# Altium PCB PCB2.PcbDoc
Units mm, origin at the board's own origin, x right, y up, seen from the top; angles counter-clockwise.
Board outline 64.77 x 54.74 mm, 2 copper layers (Top Layer, Bottom Layer); 36 components, 10 nets, 61 pads, 0 vias.
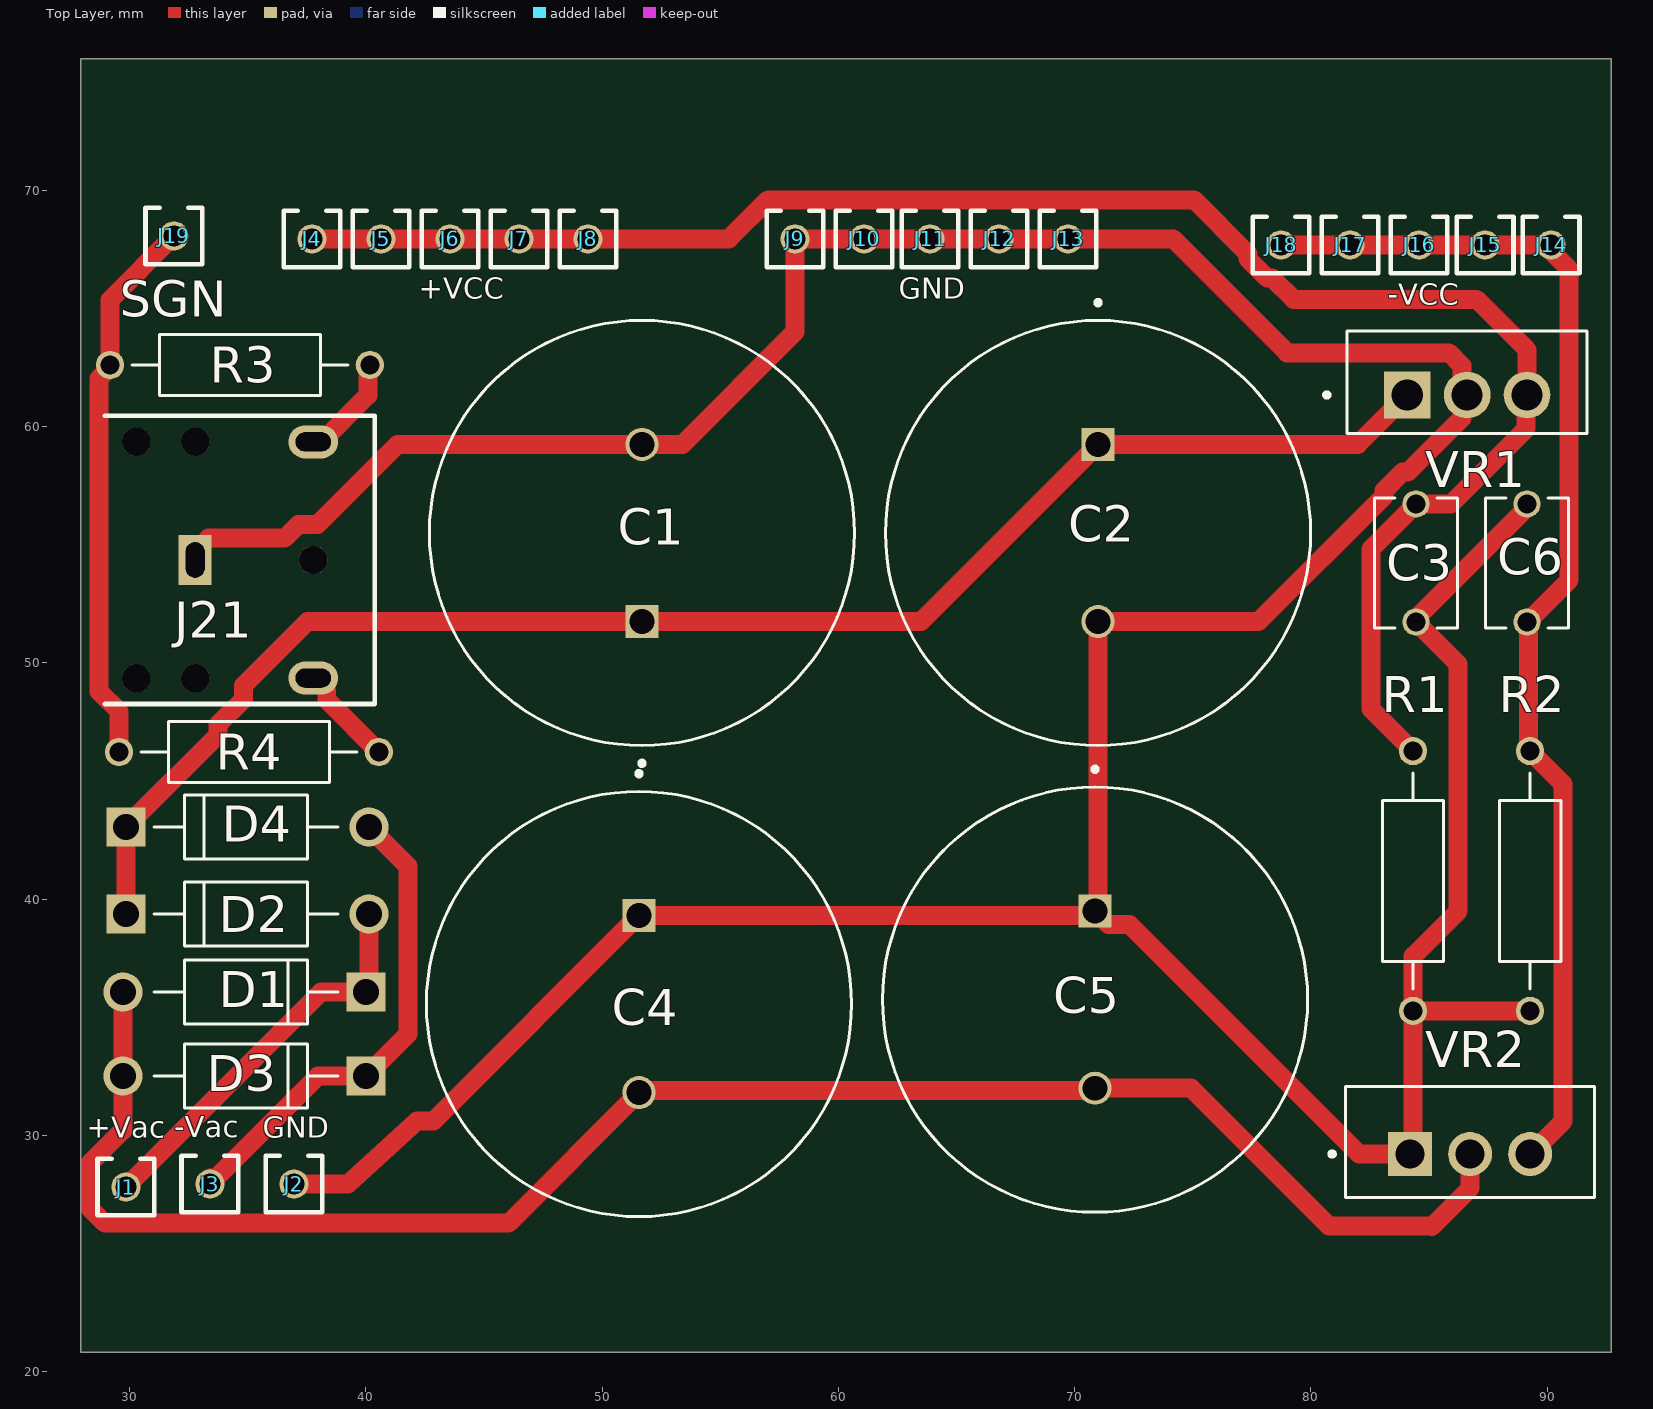
[diagram p0: Top Layer view]
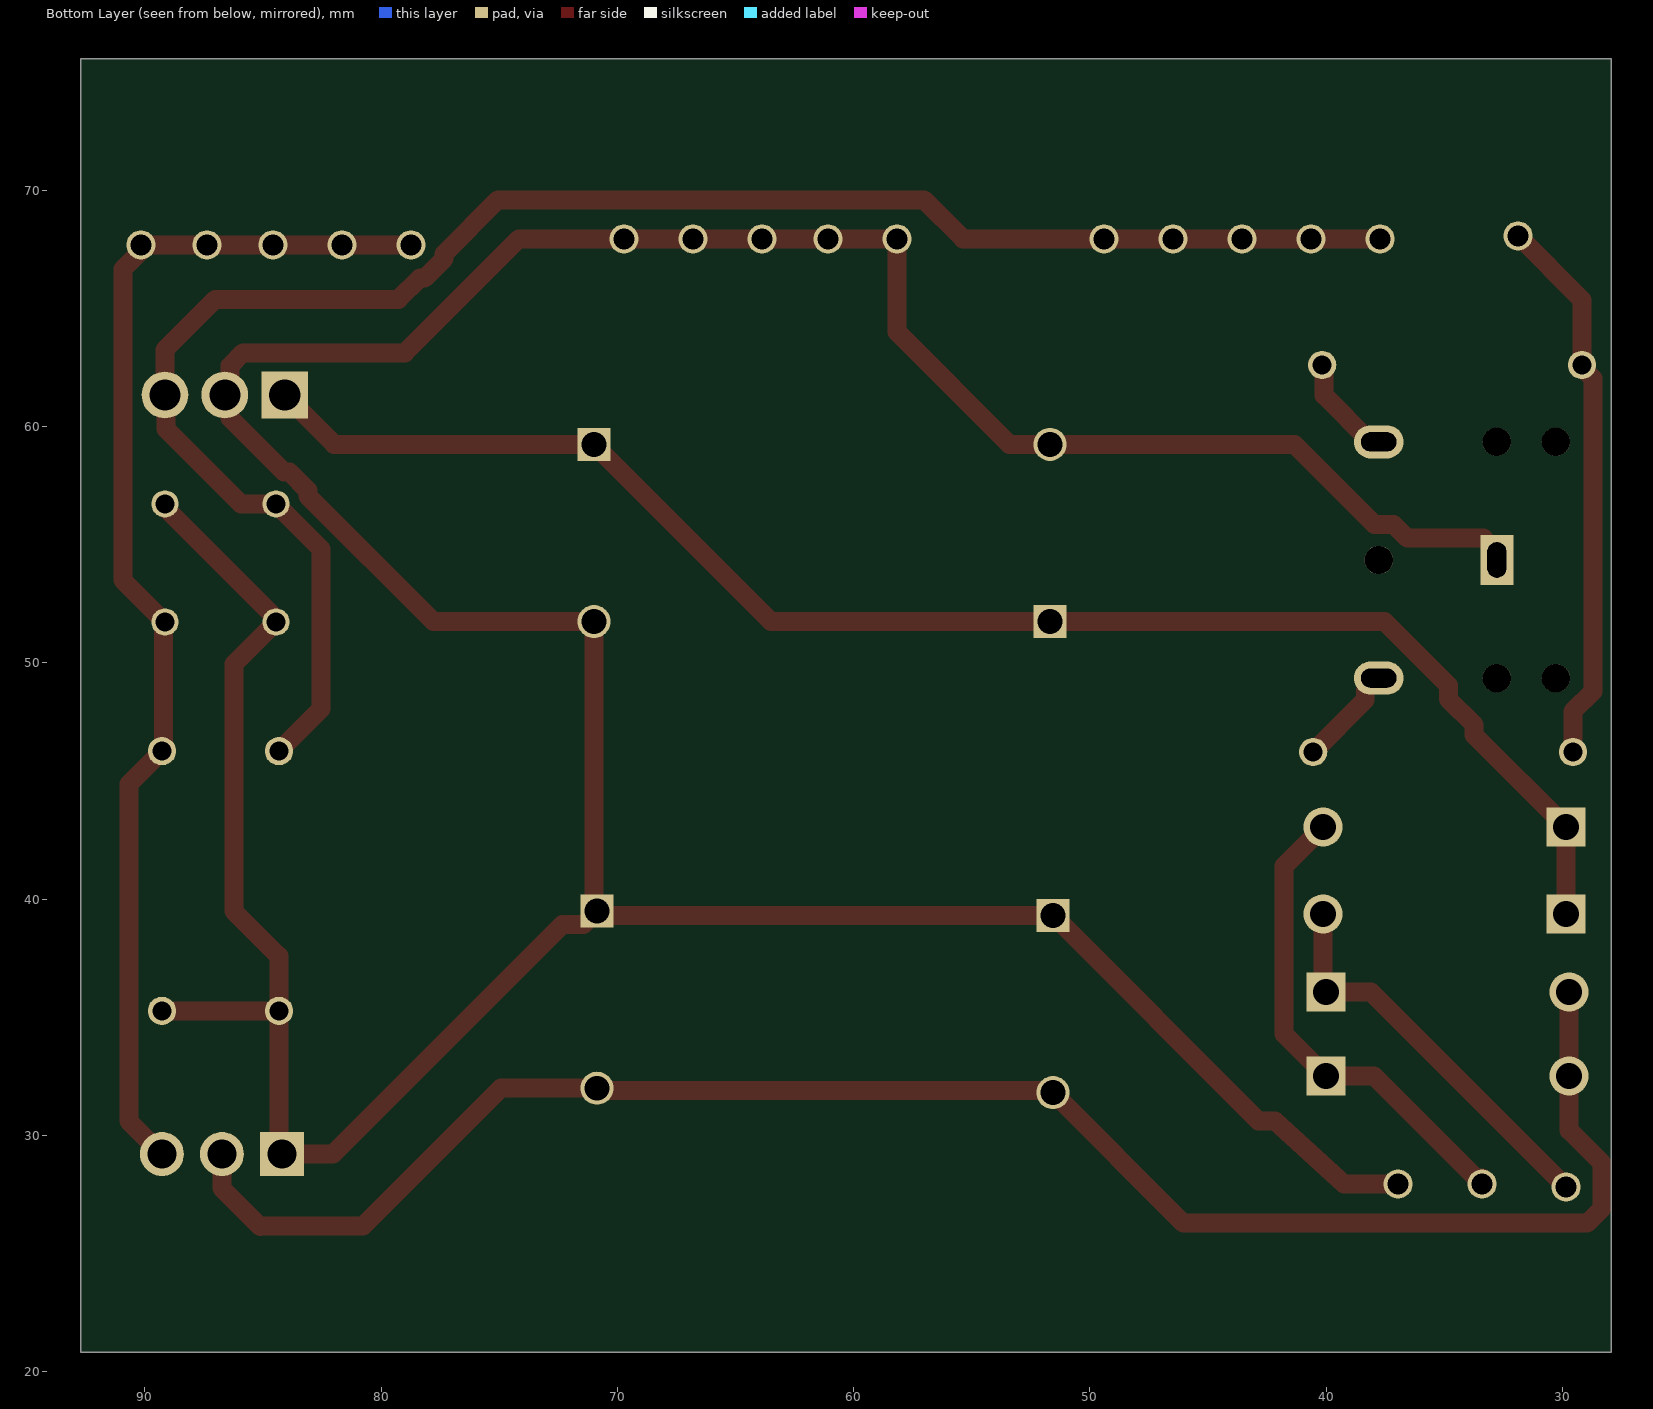
[diagram p1: Bottom Layer view, seen from below]
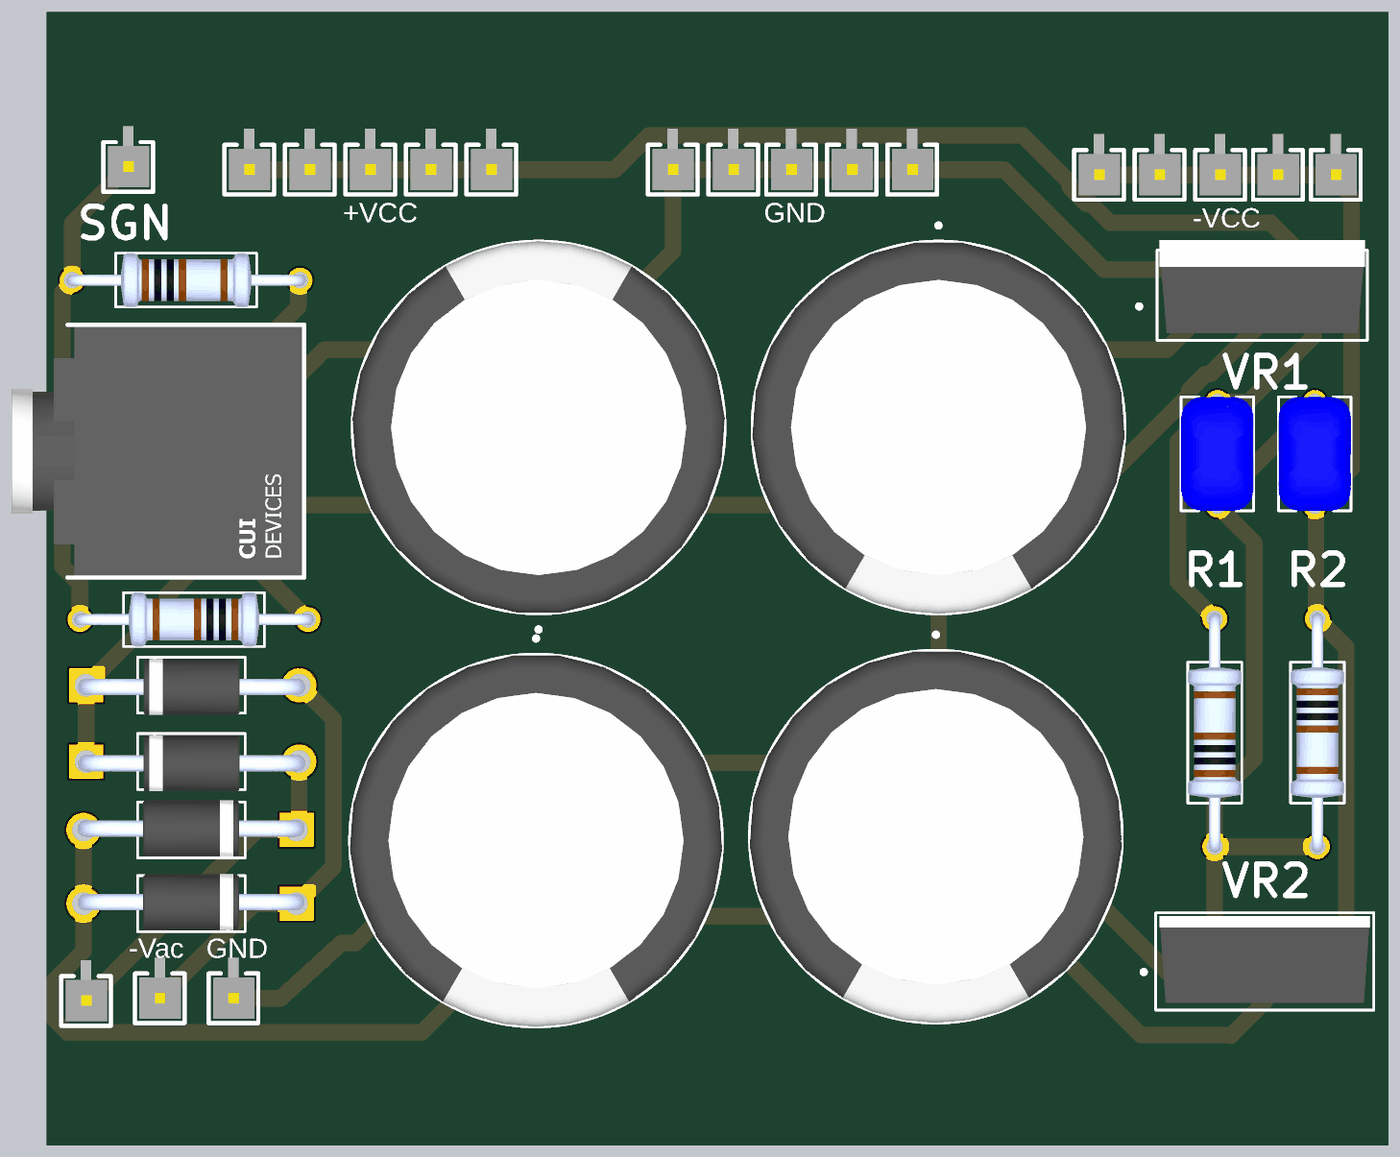
[diagram p2: 3D render of the assembled board from above, using the file's embedded part models]

## Layer stack, top to bottom
Top Solder: solder mask 0.0102, Solder Resist, Dk 3.5
Top Layer: signal copper 0.0356
Dielectric 1: dielectric 0.32, FR-4, Dk 4.8
Bottom Layer: signal copper 0.0356
Bottom Solder: solder mask 0.0102, Solder Resist, Dk 3.5

## Board outline
27.94,20.828 92.71,20.828 92.71,75.565 27.94,75.565

## Design rules (kind name [scope] priority, off if disabled: settings)
Clearance [All] p1: gap=0.381 ignorepadtopadclearanceinfootprint=FALSE except(0.508: Arc-Hole Track-Hole SMDPad-Hole THPad-Hole Via-Hole Fill-Hole Poly-Hole Region-Hole Text-Hole)
ComponentClearance [All] p1: gap=0.381 collisioncheckmode=3 verticalgap=0.381 showdistances=FALSE
PolygonConnect [All] p1: connectstyle=Relief reliefconductorwidth=0.254 reliefentries=4 polygonreliefangle="90 Angle" airgapwidth=0.254
RoutingVias [All] p1: holewidth=0.711 width=1.27 viastyle="Through Hole" minholewidth=0.711 minwidth=1.27 maxholewidth=0.711 maxwidth=1.27
SolderMaskExpansion [All] p1: expansion=0.102 istentingtop=FALSE
Width [All] p1: maxlimit=1.016 minlimit=0.254 preferedwidth=0.508
29 further rules are at their usual default settings.

## Components (designator, comment, footprint, x,y, rotation, side; value= is the part's Value field where it differs from the comment)
C1 "1000uF" CAPPRD750W80D1800H2500 51.689,55.499 r90 top
C2 "10uF" CAPPRD750W80D1800H2500 70.993,55.499 r270 top
C3 "0.1uF" CAPRB500W50L550T350H600 84.455,54.229 r90 top
C4 "1000uF" CAPPRD750W80D1800H2500 51.562,35.56 r270 top
C5 "10uF" CAPPRD750W80D1800H2500 70.866,35.747 r270 top
C6 "0.1uF" CAPRB500W50L550T350H600 89.154,54.229 r90 top
D1 "1N4007" DIOAD1060W80L520D270 34.925,36.068 r180 top
D2 "1N4007" DIOAD1060W80L520D270 34.925,39.37 r0 top
D3 "1N4007" DIOAD1060W80L520D270 34.925,32.512 r180 top
D4 "1N4007" DIOAD1060W80L520D270 34.925,43.053 r0 top
J1 "+Vac" SAMTEC_MTMM-101-XX-X-S-XXX 29.845,27.813 r0 top
J2 "GND" SAMTEC_MTMM-101-XX-X-S-XXX 36.957,27.94 r0 top
J3 "-Vac" SAMTEC_MTMM-101-XX-X-S-XXX 33.401,27.94 r0 top
J4 "+VCC" SAMTEC_MTMM-101-XX-X-S-XXX 37.719,67.945 r0 top
J5 "+VCC" SAMTEC_MTMM-101-XX-X-S-XXX 40.64,67.945 r0 top
J6 "+VCC" SAMTEC_MTMM-101-XX-X-S-XXX 43.561,67.945 r0 top
J7 "+VCC" SAMTEC_MTMM-101-XX-X-S-XXX 46.482,67.945 r0 top
J8 "+VCC" SAMTEC_MTMM-101-XX-X-S-XXX 49.403,67.945 r0 top
J9 "GND" SAMTEC_MTMM-101-XX-X-S-XXX 58.166,67.945 r0 top
J10 "GND" SAMTEC_MTMM-101-XX-X-S-XXX 61.087,67.945 r0 top
J11 "GND" SAMTEC_MTMM-101-XX-X-S-XXX 63.881,67.945 r0 top
J12 "GND" SAMTEC_MTMM-101-XX-X-S-XXX 66.802,67.945 r0 top
J13 "GND" SAMTEC_MTMM-101-XX-X-S-XXX 69.723,67.945 r0 top
J14 "-VCC" SAMTEC_MTMM-101-XX-X-S-XXX 90.17,67.691 r0 top
J15 "-VCC" SAMTEC_MTMM-101-XX-X-S-XXX 87.376,67.691 r0 top
J16 "-VCC" SAMTEC_MTMM-101-XX-X-S-XXX 84.582,67.691 r0 top
J17 "-VCC" SAMTEC_MTMM-101-XX-X-S-XXX 81.661,67.691 r0 top
J18 "-VCC" SAMTEC_MTMM-101-XX-X-S-XXX 78.74,67.691 r0 top
J19 "SGN" SAMTEC_MTMM-101-XX-X-S-XXX 31.877,68.072 r0 top
J21 "SJ1-3523N" CUI_Devices_0_MFG 33.274,54.356 r0 top
R1 "100" RESAD1100W55L680D260 84.328,40.767 r90 top
R2 "100" RESAD1100W55L680D260 89.281,40.767 r270 top
R3 "MFR-25FBF52-1K" RESAD1100W55L680D260 34.671,62.611 r0 top
R4 "MFR-25FBF52-1K" RESAD1100W55L680D260 35.052,46.228 r180 top
VR1 "LM7812CT" TO253P1057X470X2040-3 86.619,61.881 r0 top
VR2 "LM7912CT/NOPB" TO254P1054X470X1955-3 86.741,29.21 r0 top

## Footprints (in the part's own frame and the unit in brackets; to place one, negate y for a bottom-side part, rotate by r counter-clockwise, add the part's x,y. Pads: shape width x height; smd on the part's side, far side on the other; paste and mask are expansions set on the pad)
CAPPRD750W80D1800H2500 [mm]
  round 1.4 hole 1.05: N(3.75,0)
  rect 1.4x1.4 hole 1.05: P(-3.75,0)
  silkscreen extent -9.85,-9 9,9, body extent -9,-9 9,9, height 25
CAPRB500W50L550T350H600 [mm]
  round 1.15 hole 0.8: 1(-2.5,0) 2(2.5,0)
  silkscreen extent -2.75,-1.75 2.75,1.75, body extent -2.75,-1.75 2.75,1.75, height 6.81
CUI_Devices_0_MFG [mm]
  rect 1.4x2.1 hole 1.5 slot 0.8 at 0 deg paste-1000 mask+0: 1(-0.5,0)
  rrect100% 2.1x1.4 hole 0.8 slot 1.5 at 0 deg paste-1000 mask+0: 2(4.5,-5) 3(4.5,5)
  round 1.2 hole 1.2 unplated paste-1000 mask+0: ""(-3,-5) ""(-3,5) ""(-0.5,-5) ""(-0.5,5) ""(4.5,0)
  silkscreen extent -4.33,-6.1 7.1,6.1, body extent -7.2,-6.2 7.2,6.2, height 0.25
DIOAD1060W80L520D270 [mm]
  round 1.65 hole 1.1: A(5.207,0)
  rect 1.65x1.65 hole 1.1: C(-5.08,0)
  silkscreen extent -3.9,-1.35 3.9,1.35, body extent -5.46,-1.42 5.49,1.27, height 3.96
RESAD1100W55L680D260 [mm]
  round 1.2 hole 0.8: 1(-5.5,0) 2(5.5,0)
  silkscreen extent -4.58,-1.3 4.58,1.3, body extent -5.77,-1.3 5.77,1.3, height 2.6
SAMTEC_MTMM-101-XX-X-S-XXX [mm]
  round 1.24 hole 0.89: 01(0,0)
  silkscreen extent -1.2,-1.2 1.2,1.2, body extent -0.98,-0.98 1.02,1.02, height 7.23
TO253P1057X470X2040-3 [mm]
  rect 1.98x1.98 / inner round 1.98 / far side rect 1.98x1.98 hole 1.32: 1(-2.535,-0.54)
  round 1.98 hole 1.32: 2(0,-0.54) 3(2.535,-0.54)
  silkscreen extent -6.04,-2.17 5.08,2.17, body extent -5,-1.84 5,2.66, height 18.95
TO254P1054X470X1955-3 [mm]
  rect 1.86x1.86 / inner round 1.86 / far side rect 1.86x1.86 hole 1.24: 1(-2.54,0)
  round 1.86 hole 1.24: 2(0,0) 3(2.54,0)
  silkscreen extent -5.94,-1.84 5.27,2.86, body extent -5.08,-1.49 5.08,2.71, height 22.86

## Part data
C1 C2 C4 C5: library part EEUEE2V820S, "CAP ALUM 82UF 20% 350V RADIAL", Package="RADIAL-2 Panasonic", Availability="In Stock", Check_prices=https://www.snapeda.com/parts/EEU-EE2V820S/Panasonic+Electronic+Components/view-part/?ref=eda, MF="Panasonic Electronic", MP=EEU-EE2V820S, Price=None, Purchase-URL=https://pricing.snapeda.com/search/part/EEU-EE2V820S/?ref=eda, SnapEDA_Link=https://www.snapeda.com/parts/EEU-EE2V820S/Panasonic+Electronic+Components/view-part/?ref=snap
C3 C6: library part FG26X7R2E104KNT06, "0.1ÂµF Â±10% 250V Ceramic Capacitor X7R Radial", Package="Radial TDK", Availability="In Stock", Check_prices=https://www.snapeda.com/parts/FG26X7R2E104KNT06/TDK/view-part/?ref=eda, MF=TDK, MP=FG26X7R2E104KNT06, Price=None, Purchase-URL=https://pricing.snapeda.com/search/part/FG26X7R2E104KNT06/?ref=eda, SnapEDA_Link=https://www.snapeda.com/parts/FG26X7R2E104KNT06/TDK/view-part/?ref=snap
D1 D2 D3 D4: "Diode Switching 1KV 1A 2-Pin DO-41", Package=None, Availability=Unavailable, MP=1N4007, Price=None
J1 J2 J3 J4 J5 J6 J7 J8 J9 J10 J11 J12 J13 J14 J15 J16 J17 J18 J19: library part MTMM-101-XX-X-S-XXX, "Connector Header position", Package=None, Availability=Unavailable, MP=MTMM-101-XX-X-S-XXX, Price=None
R1 R2: library part MFR-25FBF52-1K, "1.78 kOhms Â±1% 0.25W, 1/4W Through Hole Resistor Axial - Metal Film", Package="Axial Yageo", Availability="In Stock", Check_prices=https://www.snapeda.com/parts/MFR-25FBF52-1K/Yageo/view-part/?ref=eda, MF=Yageo, MP=MFR-25FBF52-1K, Price=None, Purchase-URL=https://pricing.snapeda.com/search/part/MFR-25FBF52-1K/?ref=eda, SnapEDA_Link=https://www.snapeda.com/parts/MFR-25FBF52-1K/Yageo/view-part/?ref=snap
R3 R4: "1.78 kOhms Â±1% 0.25W, 1/4W Through Hole Resistor Axial - Metal Film", Package="Axial Yageo", Availability="In Stock", Check_prices=https://www.snapeda.com/parts/MFR-25FBF52-1K/Yageo/view-part/?ref=eda, MF=Yageo, MP=MFR-25FBF52-1K, Price=None, Purchase-URL=https://pricing.snapeda.com/search/part/MFR-25FBF52-1K/?ref=eda, SnapEDA_Link=https://www.snapeda.com/parts/MFR-25FBF52-1K/Yageo/view-part/?ref=snap
VR1: "Linear Voltage Regulator IC Positive Fixed 1 Output  1A TO-220-3", Package=TO-220, Availability=Unavailable, Check_prices=https://www.snapeda.com/parts/LM7812CT/Onsemi/view-part/?ref=eda, MF="ON Semiconductor", MP=LM7812CT, Price=None, SnapEDA_Link=https://www.snapeda.com/parts/LM7812CT/Onsemi/view-part/?ref=snap
VR2: "1.5-A, negative linear voltage regulator", Package="TO-220-3 Texas Instruments", Availability="In Stock", Check_prices=https://www.snapeda.com/parts/LM7912CT/NOPB/Texas+Instruments/view-part/?ref=eda, MF="Texas Instruments", MP=LM7912CT/NOPB, Price=None, Purchase-URL=https://pricing.snapeda.com/search/part/LM7912CT/NOPB/?ref=eda, SnapEDA_Link=https://www.snapeda.com/parts/LM7912CT/NOPB/Texas+Instruments/view-part/?ref=snap

## Nets (pads, with @x,y where several pads share a name; then routed paths per layer and width w, separated by ;. In a path a pad name is that pad's centre, name@x,y a point inside that pad or via, vN(x,y) a via of type N, cw(c..) or ccw(c..) an arc to the next point about the centre after c; other vN are vias at no path point)
GND: C1.N C2.N C3.1 C4.P C5.P C6.2 J2.01 J9.01 J10.01 J11.01 J12.01 J13.01 J21.1 R1.1 R2.2 VR1.2 VR2.1 | length 190
  Top Layer w0.8: J21.1 32.774,54.706 33.347,55.279 36.564,55.279 37.149,55.864 37.957,55.864 41.342,59.249 C1.N 53.407,59.249 58.166,64.008 J9.01 J10.01 J11.01 J12.01 J13.01 74.168,67.945 78.994,63.119 85.852,63.119 86.393,62.578 86.393,61.567 VR1.2 86.393,61.115 86.393,60.358 84.12,58.085 83.893,58.085 83.099,57.291 83.099,57.064 77.784,51.749 C2.N 70.993,39.624 C5.P ; J2.01 39.243,27.94 42.164,30.607 42.859,30.607 C4.P 70.679,39.31 C5.P ; C6.2 89.154,56.578 84.455,51.88 C3.1 86.233,49.951 86.233,39.497 84.328,37.592 R1.1 ; R2.2 R1.1 ; C5.P 71.439,38.924 72.328,38.924 82.042,29.21 VR2.1 84.328,29.337 R1.1
NetC1_P: C1.P C2.P D2.C D4.C VR1.1 | length 66.3
  Top Layer w0.8: D2.C@29.972,39.497 D2.C D4.C 33.733,46.941 33.733,47.374 34.827,48.468 34.827,49.051 37.525,51.749 C1.P 63.493,51.749 C2.P 81.992,59.249 VR1.1
NetC3_2: C3.2 J4.01 J5.01 J6.01 J7.01 J8.01 R1.2 VR1.3 | length 76.2
  Top Layer w0.8: J4.01 J5.01 J6.01 J7.01 J8.01 55.372,67.945 57.023,69.596 75.057,69.596 77.339,67.314 77.339,67.111 78.16,66.29 78.363,66.29 79.268,65.385 87.015,65.385 89.154,63.246 VR1.3 89.104,61.291 89.104,59.894 85.939,56.729 C3.2 82.55,54.824 82.55,48.045 R1.2
NetC4_N: C4.N C5.N D1.A D3.A VR2.2 | length 75.3
  Top Layer w0.8: D1.A D3.A 29.718,30.213 28.321,28.816 28.321,26.924 28.956,26.289 46.041,26.289 51.655,31.903 70.773,31.903 C5.N 74.937,31.997 80.772,26.162 85.09,26.162 85.112,26.14 86.741,27.769 VR2.2
NetC6_1: C6.1 J14.01 J15.01 J16.01 J17.01 J18.01 R2.1 VR2.3 | length 52.2
  Top Layer w0.8: J18.01 J17.01 J16.01 J15.01 J14.01 90.17,67.424 90.932,66.662 90.932,53.507 C6.1 89.218,51.665 89.218,46.33 R2.1 90.678,44.87 90.678,30.607 VR2.3
NetD1_C: D1.C D2.A J1.01 | length 16.9
  Top Layer w0.8: J1.01 38.1,36.068 D1.C 40.132,36.195 D2.A
NetD3_C: D3.C D4.A J3.01 | length 20.7
  Top Layer w0.8: J3.01@33.401,28.194 J3.01 37.973,32.512 D3.C 41.783,34.29 41.783,41.402 D4.A
NetJ19_01: J19.01 R3.1 R4.2 | length 23.5
  Top Layer w0.8: R4.2 29.552,47.945 28.702,48.795 28.702,62.034 29.171,62.503 29.171,65.366 J19.01
NetJ21_2: J21.2 R4.1 | length 4.3
  Top Layer w0.8: J21.2 37.814,49.356 38.343,48.827 38.343,48.437 R4.1
NetJ21_3: J21.3 R3.2 | length 4.7
  Top Layer w0.8: J21.3@37.973,59.182 37.948,59.182 J21.3 38.124,59.356 40.088,61.32 40.088,62.528 R3.2
pads on no net: J21.

## Silkscreen, mask and mechanical layers (free items; w line width, h text height)
Top Component Outline:
  lines w0.125: 27.94,25.527 28.067,25.527 ; 28.067,25.527 27.94,25.4 27.94,70.993 92.71,70.993 92.71,25.527 28.067,25.527